# EAGLE board UniRF-Rev02 (EAGLE 6.6.0)
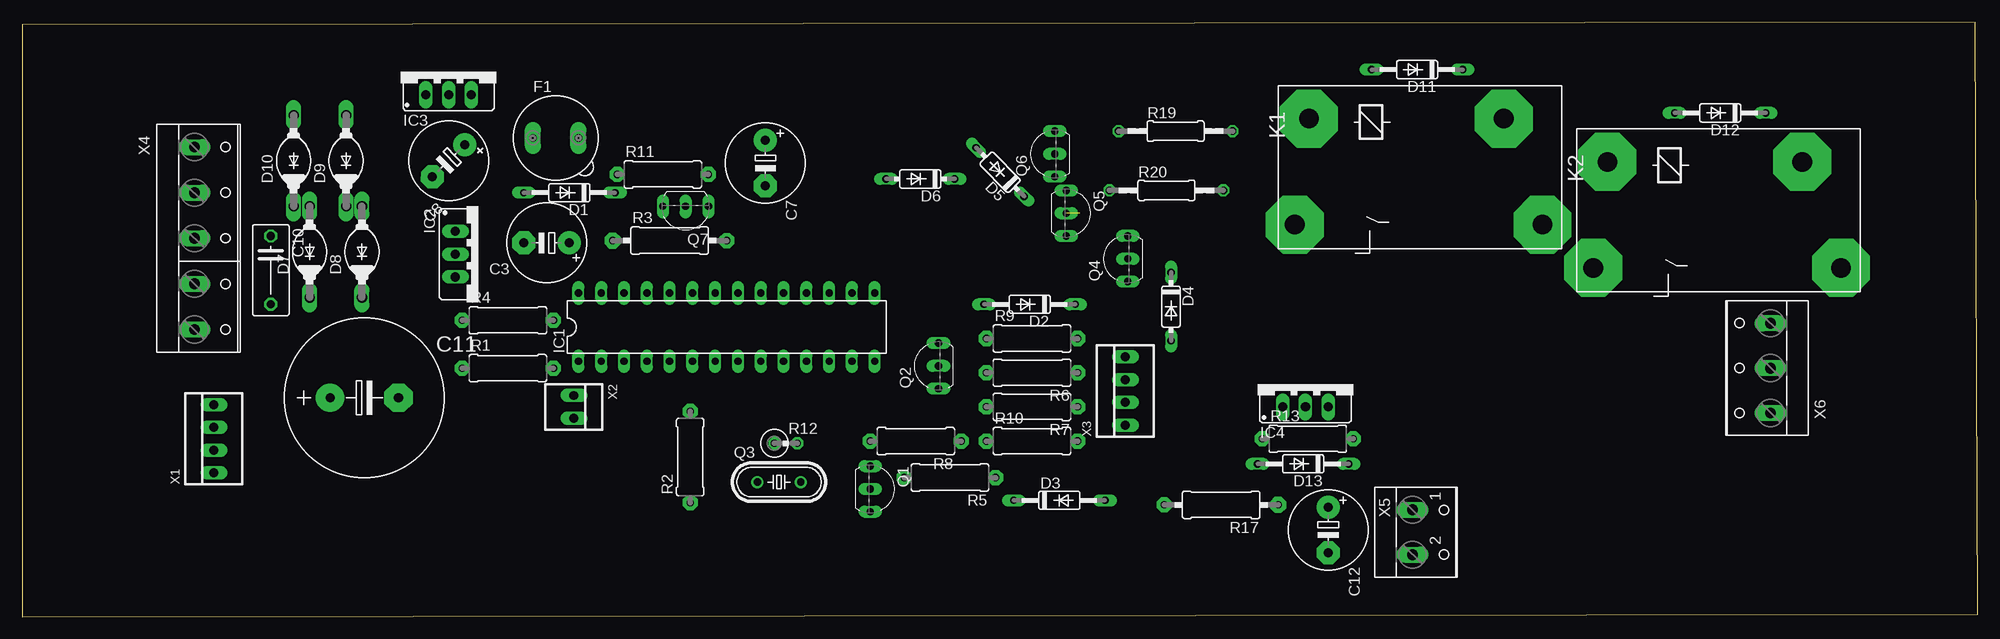
[diagram p0: board, top side]
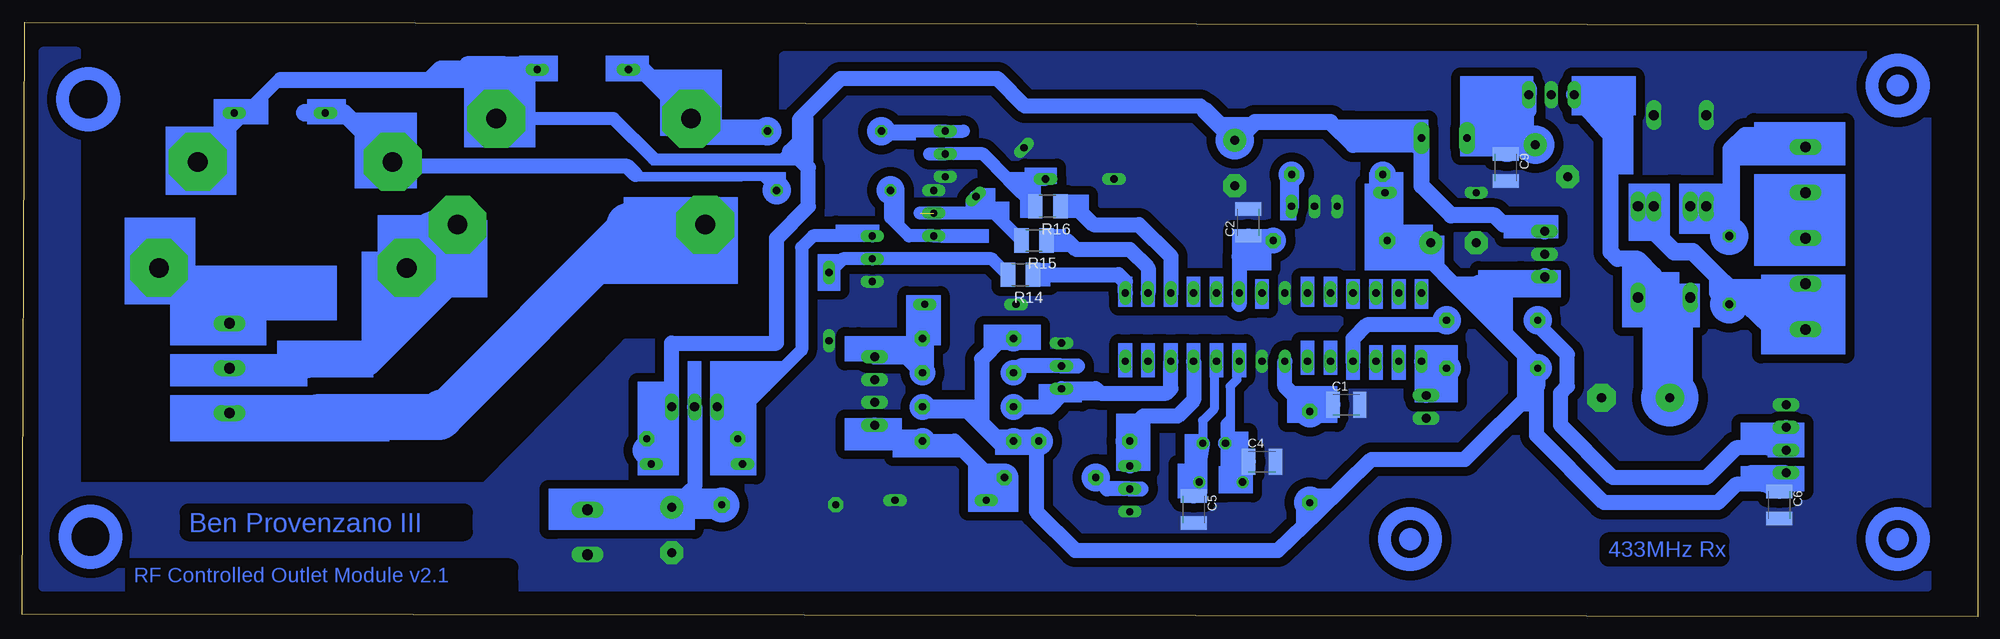
[diagram p1: board, bottom side, seen from below]

Size 217.91 x 66.22 mm. Coordinates in mm from the lower left corner, seen from the top.
Outline: 0,0 217.91,0.25 217.66,66.22 0,65.96 0,0
Copper layers (1*16): Top 0.035mm / dielectric 1.5mm / Bottom 0.035mm
Design rules "default": minimum track width 10mil, minimum drill 24mil, track to track 8mil, track to pad 8mil, pad to pad 8mil, via to via 8mil, smd to smd 8mil, copper to edge 40mil, drill to drill 8mil, minimum pad ring 10mil, minimum via ring 8mil, stop-mask expansion 4mil, vias tented up to drill 0mil, thermal gap 10mil

## Footprints (pad centres in the part's own frame; a part is rotated, then mirrored left to right if it is on the bottom)
C1210K = smd 1.5 x 2.9: 1 -1.5,0; 2 1.5,0
E5-8,5 = drill 1.016 pad 2.54: + -2.54,0 | drill 1.016 pad 2.54 octagon: - 2.54,0
C075-042X103 = drill 0.914 octagon: 1 -3.81,0; 2 3.81,0
E7,5-18 = drill 1.016 pad 3.15: + -3.81,0 | drill 1.016 pad 3.15 octagon: - 3.81,0
DO35-10 = drill 0.813 long: A 5.08,0; C -5.08,0
DO35-7 = drill 0.813 long: A 3.81,0; C -3.81,0
DO204-10 = drill 1.118 long: A 5.08,0; C -5.08,0
19560 = drill 0.813 pad 1.778 long: 1 -2.54,0; 2 2.54,0
DIL28-3 = drill 0.813 long: 1 -16.51,-3.81; 2 -13.97,-3.81; 3 -11.43,-3.81; 4 -8.89,-3.81; 5 -6.35,-3.81; 6 -3.81,-3.81; 7 -1.27,-3.81; 8 1.27,-3.81; 9 3.81,-3.81; 10 6.35,-3.81; 11 8.89,-3.81; 12 11.43,-3.81; 13 13.97,-3.81; 14 16.51,-3.81; 15 16.51,3.81; 16 13.97,3.81; 17 11.43,3.81; 18 8.89,3.81; 19 6.35,3.81; 20 3.81,3.81; 21 1.27,3.81; 22 -1.27,3.81; 23 -3.81,3.81; 24 -6.35,3.81; 25 -8.89,3.81; 26 -11.43,3.81; 27 -13.97,3.81; 28 -16.51,3.81
78XXS = drill 1.016 long: GND 0,-2.54; IN -2.54,-2.54; OUT 2.54,-2.54
G2RA = drill 2.2 pad 6.452 octagon: 1 -0.762,-5.461; 2 -5.08,6.35; P 22.53,6.35; S 20.955,-5.461
TO92-EBC = drill 0.813 long: B 0,-1.27; C -2.54,-1.27; E 2.54,-1.27
HC49/S = drill 0.813: 1 -2.413,0; 2 2.413,0
0309/10 = drill 0.8 pad 1.676 octagon: 1 -5.08,0; 2 5.08,0
0309/12 = drill 0.8 pad 1.778 octagon: 1 -6.35,0 | drill 0.8 pad 1.676 octagon: 2 6.35,0
0309V = drill 0.813 octagon: 1 -1.27,0; 2 1.27,0
R1210 = smd 1.6 x 2.7: 1 -1.4,0; 2 1.4,0
0207/12 = drill 0.813 octagon: 1 -6.35,0; 2 6.35,0
22-23-2041 = drill 1 long: 1 -3.81,0; 2 -1.27,0; 3 1.27,0; 4 3.81,0
22-23-2021 = drill 1 long: 1 -1.27,0; 2 1.27,0
W237-5P = drill 1.194 long: 1 -10.16,-0.635; 2 -5.08,-0.635; 3 0,-0.635; 4 5.08,-0.635; 5 10.16,-0.635
W237-102 = drill 1.194 long: 1 -2.5,-1.27; 2 2.5,-1.27
W237-103 = drill 1.194 long: 1 -5,-1.29; 2 0,-1.29; 3 5,-1.29

## Placement (x,y rotation side)
C1  .1  [C1210K]  70.36,23.62 0 bottom
C2  .1  [C1210K]  81.28,43.94 90 bottom
C3  47uF  [E5-8,5]  58.42,41.66 180 top
C4  22pF  [C1210K]  79.76,17.27 0 bottom
C5  22pF  [C1210K]  87.38,11.94 270 bottom
C6  .1  [C1210K]  22.1,12.45 270 bottom
C7  47uF  [E5-8,5]  82.8,50.55 270 top
C8  47uF  [E5-8,5]  47.5,50.8 224.6 top
C9  .1  [C1210K]  52.58,50.04 270 bottom
C10  .1  [C075-042X103]  27.69,38.61 270 top
C11  2200uF  [E7,5-18]  38.1,24.38 0 top
C12  47uF  [E5-8,5]  145.54,9.65 270 top
D1  TVS_5V  [DO35-10]  60.96,47.24 180 top
D2  TVS_5V  [DO35-10]  112.27,34.8 180 top
D3  TVS_5V  [DO35-10]  115.57,12.95 0 top
D4  9V1  [DO35-7]  128.02,34.54 270 top
D5  9V1  [DO35-7]  108.97,49.53 134.6 top
D6  9V1  [DO35-7]  100.08,48.77 180 top
D7  4007  [DO204-10]  32,40.64 90 top
D8  4007  [DO204-10]  37.85,40.64 90 top
D9  4007  [DO204-10]  36.07,50.8 90 top
D10  4007  [DO204-10]  30.23,50.8 90 top
D11  4007  [DO35-10]  155.45,60.96 180 top
D12  4007  [DO35-10]  189.23,56.13 180 top
D13  9V1  [DO35-10]  142.75,17.02 180 top
F1  1A  [19560]  59.44,53.34 0 top
IC1  ATmega328p  [DIL28-3]  78.49,32.26 0 top
IC2  7805  [78XXS]  50.8,40.39 270 top
IC3  7812  [78XXS]  47.5,60.71 0 top
IC4  PMOS  [78XXS]  143,25.91 0 top
K1  ALF1P12  [G2RA]  164.34,50.04 180 top
K2  ALF1P12  [G2RA]  197.61,45.21 180 top
Q1  BC546  [TO92-EBC]  95.76,14.22 270 top
Q2  BC546  [TO92-EBC]  100.84,27.94 90 top
Q3  16MHz  [HC49/S]  84.33,14.99 0 top
Q4  2106  [TO92-EBC]  121.92,39.88 90 top
Q5  2106  [TO92-EBC]  117.6,44.96 270 top
Q6  2106  [TO92-EBC]  113.79,51.56 90 top
Q7  3LED  [TO92-EBC]  73.91,44.45 180 top
R1  10K  [0309/10]  54.1,27.69 0 top
R2  BEAD  [0309/10]  74.42,17.78 90 top
R3  BEAD  [0309/12]  72.14,41.91 0 top
R4  100  [0309/10]  54.1,33.02 0 top
R5  330  [0309/10]  103.38,15.49 180 top
R6  330  [0309/10]  112.52,27.18 180 top
R7  11K  [0309/10]  112.52,23.37 180 top
R8  11K  [0309/10]  99.57,19.56 180 top
R9  4K7  [0309/10]  112.52,30.99 0 top
R10  4K7  [0309/10]  112.52,19.56 0 top
R11  2K7  [0309/10]  71.37,49.28 0 top
R12  1M  [0309V]  85.09,19.3 0 top
R13  4K7  [0309/10]  143.26,19.81 0 top
R14  1K  [R1210]  106.68,38.1 180 bottom
R15  1K  [R1210]  105.16,41.91 180 bottom
R16  1K  [R1210]  103.63,45.72 180 bottom
R17  1K  [0309/12]  133.6,12.45 180 top
R19  0  [0207/12]  128.52,54.1 0 top
R20  0  [0207/12]  127.51,47.5 0 top
X1  RX_MOD  [22-23-2041]  21.34,19.81 90 top
X2  RESET  [22-23-2021]  61.47,23.37 270 top
X3  SWITCH  [22-23-2041]  122.94,25.15 90 top
X4  [W237-5P]  19.81,42.16 270 top
X5  [W237-102]  156.21,9.4 270 top
X6  [W237-103]  193.55,27.69 90 top

## Library data of the parts
C1-C12 R1-R17 R19 R20 = resistor
D1-D13 = diode
F1 = fuse; MPN: 56000001009; OC_FARNELL: 1185363; OC_NEWARK: 15P8392
IC1 = ic-package
IC2-IC4 = v-reg
K1 K2 = relay; OC_FARNELL: unknown; OC_NEWARK: unknown
Q1 Q2 Q4-Q7 = transistor-npn
Q3 = crystal; OC_FARNELL: 1667008; OC_NEWARK: unknown
X1 X3 = con-molex; MF: MOLEX; MPN: 22-23-2041; OC_FARNELL: 1462920; OC_NEWARK: 38C0355
X2 = con-molex; MF: MOLEX; MPN: 22-23-2021; OC_FARNELL: 1462926; OC_NEWARK: 25C3832
X4 = con-wago-508; OC_FARNELL: unknown; OC_NEWARK: unknown
X5 = con-wago-500; MPN: 237-102; OC_FARNELL: unknown; OC_NEWARK: 70K9898
X6 = con-wago-500; MPN: 237-103; OC_FARNELL: unknown; OC_NEWARK: 18M7116

## Nets
GND: C1.2 C2.2 C3.- C4.2 C5.2 C6.2 C7.- C8.- C9.2 C11.- C12.- D1.A D2.A D3.A D4.A D5.A D6.A D9.A D10.A IC1.8 IC1.22 IC2.GND IC3.GND Q1.E Q2.E Q4.C Q5.C Q6.C Q7.B Q7.E R17.2 X1.4 X2.2 X3.2 X3.3 X5.2
N$1: D4.C Q4.B R14.2
N$2: IC1.1 R1.2 X2.1
N$3: IC1.4 R4.2
N$4: C2.1 IC1.20 R3.2
N$5: R4.1 X1.2 X1.3
N$7: IC1.11 Q1.C R8.2
N$8: Q1.B R5.2
N$9: C3.+ C6.1 D1.C IC2.OUT R1.1 R2.1 R3.1 R7.1 R8.1 R9.1 R10.1 R11.1 X1.1
N$10: Q2.B R6.2
N$11: IC1.12 Q2.C R7.2
N$13: C4.1 IC1.9 Q3.1 R12.1
N$14: C5.1 IC1.10 Q3.2 R12.2
N$15: D3.C R5.1 R10.2 X3.1
N$16: D2.C R6.1 R9.2 X3.4
N$17: D6.C Q6.B R16.2
N$18: IC1.15 R14.1
N$19: IC1.16 R15.1
N$20: IC1.17 R16.1
N$21: D5.C Q5.B R15.2
N$22: Q7.C R11.2
N$24: C7.+ D11.C D12.C D13.C F1.2 IC2.IN IC4.OUT K1.1 K2.1 R13.2
N$25: C8.+ C9.1 F1.1 IC3.OUT
N$26: C10.2 D8.A D9.C X4.4 X4.5
N$27: D13.A IC4.IN Q4.E R13.1
N$28: Q5.E R20.1
N$29: Q6.E R19.1
N$30: C10.1 D7.A D10.C X4.1
N$31: C11.+ D7.C D8.C IC3.IN
N$32: C12.+ IC4.GND R17.1 X5.1
N$33: D11.A K1.S R19.2
N$35: C1.1 IC1.7 R2.2
N$36: K2.2 X6.3
N$37: X4.2 X4.3
N$38: D12.A K2.S R20.2
N$39: K1.P X6.1
N$43: K1.2 K2.P X6.2

## Tracks (layer width: path | path; a pad name or v marks a point on that pad's centre or on a via)
GND
  pour Bottom (isolate 1.016, no thermals): 5.59,62.48 133.1,62.48 133.1,30.48 150.62,30.48 166.37,14.48 211.84,14.48 211.84,62.99 215.65,62.99 215.65,3.3 5.59,3.3
N$1
  Bottom 1.422: R14.2 109.86,39.88 Q4.B 126.49,39.88 D4.C
N$2
  Bottom 1.676: R1.2 59.94,28.45 61.21,28.45 | 61.21,28.45 IC1.1 | X2.1 61.21,24.89 61.21,28.45
N$3
  Bottom 1.676: IC1.4 69.6,30.99 68.07,32.51 59.69,32.51 R4.2
N$4
  Bottom 1.676: 82.3,34.8 IC1.20 82.3,40.13 81.28,41.15 | R3.2 79.25,41.15 81.28,41.15 | 81.28,41.15 C2.1
N$5
  Bottom 1.676: X1.2 X1.3 22.61,19.81 22.61,19.56 23.37,18.8 26.92,18.8 30.23,15.49 40.64,15.49 46.48,21.34 46.48,24.89 45.72,25.65 45.72,29.21 49.02,32.51 R4.1
N$6
  Bottom 1.676: 49.53,28.19 49.53,28.45 52.32,31.24
N$7
  Bottom 1.676: IC1.11 87.38,24.13 89.15,22.35 92.96,22.35 94.49,20.83 R8.2 Q1.C
N$8
  Bottom 1.676: 93.22,14.22 Q1.B 97.03,14.22 R5.2
N$9
  Bottom 1.676: R1.1 57.15,35.81 61.98,40.64 C3.+ R3.1 65.79,46.23 65.91,46.71 | R1.1 49.02,25.65 49.15,25.53 | 49.15,25.53 57.15,17.53 67.56,17.53 73.62,11.63 | 65.91,46.71 D1.C 66.29,46.23 | 48.51,27.43 48.77,27.69 R1.1 | R11.1 65.91,49.28 65.91,46.71 | X1.1 25.38,16 C6.1 23.9,14.73 26.92,14.73 28.96,12.7 41.66,12.7 49.15,20.19 49.15,25.53 | R7.1 113.03,23.37 | 113.03,23.37 108.71,19.05 107.19,19.05 107.44,19.3 R10.1 107.19,19.3 105.92,19.3 105.66,19.56 R8.1 | 113.03,23.37 112.01,23.37 111,22.35 | 111,22.35 111,21.59 108.71,19.3 104.65,19.3 104.9,19.05 104.9,11.68 100.58,7.37 77.98,7.37 73.62,11.63 | R2.1 73.62,11.89 73.62,11.63 | R9.1 107.7,30.73 108.97,30.73 111,28.7 111,22.35
  Bottom 1.778: 55.63,37.08 56.9,35.81 57.15,35.81
  Bottom 1.93: IC2.OUT 49.02,37.08 55.63,37.08
N$10
  Bottom 1.676: 100.33,27.94 Q2.B 106.68,27.94 R6.2
N$11
  Bottom 1.676: R7.2 103.38,23.37 102.11,24.64 Q2.C 98.3,25.4 97.79,24.89 90.42,24.89 89.92,25.4 IC1.12
N$13
  Bottom 1.016: IC1.9 82.55,28.19 82.55,26.42 83.31,25.65 83.31,22.1 83.82,21.59 R12.1 83.82,19.05
  Bottom 1.676: R12.1 83.82,19.33 C4.1 83.03,15.09 Q3.1
N$14
  Bottom 1.016: IC1.10 85.09,28.45 85.09,23.11 86.36,21.84 R12.2
  Bottom 1.676: R12.2 C5.1 87.91,15.14 Q3.2
N$15
  Bottom 1.676: R5.1 109.79,14.76 | 109.79,14.76 D3.C | X3.1 121.16,19.56 R10.2 114.05,19.56 109.98,15.49 109.98,14.95 109.79,14.76
N$16
  Bottom 1.676: X3.4 119.38,28.96 R6.1 R9.2 117.35,31.24 D2.C
N$17
  Bottom 1.422: R16.2 108.02,48.7 | 108.02,48.7 110.87,51.56 Q6.B 116.84,51.56 | D6.C 103.95,48.7 108.02,48.7
N$18
  Bottom 1.676: R14.1 95.76,38.1 95,37.34 IC1.15
N$19
  Bottom 1.676: IC1.16 92.46,38.86 94.49,40.89 100.45,40.89 101.47,41.91 R15.1
N$20
  Bottom 1.676: IC1.17 89.92,40.13 93.47,43.69 98.55,43.69 100.45,45.59 R16.1
N$21  (1 unrouted)
  Bottom 1.422: R15.2 109.6,44.96 111.76,44.96 | D5.C 111.76,46.7 111.76,44.96 | 111.76,44.96 117.86,44.96
N$22
  Bottom 1.676: Q7.C R11.2
N$24
  Bottom 1.016: 133.1,51.05 147.57,51.05
  Bottom 1.27: 132.33,51.82 133.1,51.05
  Bottom 1.422: 147.57,51.05 152.02,55.5 K1.1 | D11.C 160.78,60.71 165.1,60.71 164.08,61.72 | 164.08,61.72 160.53,61.72 | 164.08,61.72 168.4,61.72 167.64,60.96 166.37,60.96 166.62,61.21 171.45,61.21 172.72,59.94 189.23,59.94 193.04,56.13 | 193.04,56.13 198.37,50.8 K2.1 | 193.04,56.13 D12.C
  Bottom 1.676: 86.11,56.39 86.61,56.9 106.17,56.9 109.22,59.94 126.75,59.94 131.32,55.37 131.32,52.83 | 132.21,51.94 130.3,50.04 130.3,45.72 133.86,42.16 133.86,30.48 145.54,30.48 IC4.OUT 145.54,21.34 147.32,19.56 | R13.2 147.32,19.56 | D13.C 147.07,17.53 147.32,19.56
  Bottom 1.778: IC2.IN 49.02,43.69 52.83,43.69 53.85,44.7 58.67,44.7 61.98,48.01 F1.2 62.74,52.58 69.6,52.58 72.14,55.12 80.52,55.12 82.55,53.09 C7.+ | 131.32,52.83 132.21,51.94 132.33,51.82
  Bottom 1.93: C7.+ 86.11,56.39 | 165.1,60.71 K1.1
N$25
  Bottom 1.778: 50.29,53.57 C8.+ 50.06,53.34 F1.1 | 50.29,53.57 50.29,59.18 50.04,58.93 IC3.OUT 50.04,56.39 | 50.29,53.57 52.32,51.54 C9.1
N$26
  Bottom 1.93: C10.2 28.96,36.07 28.96,37.85 | 28.96,37.85 31.75,40.64 33.78,40.64 36.83,43.69 36.83,45.72 D9.C D8.A | X4.4 X4.5 20.96,30.23 28.96,37.85
N$27
  Bottom 1.422: Q4.E 129.79,42.42 131.06,41.15 131.06,29.72 138.18,22.61 | 138.18,22.61 R13.1 138.18,19.05 | IC4.IN 139.7,22.61 138.18,22.61
  Bottom 1.676: D13.A 138.43,17.78 138.18,19.05
N$28
  Bottom 1.422: 114.55,42.42 Q5.E 119.13,42.42 121.16,44.45 R20.1
N$29
  Bottom 1.422: 113.03,54.1 Q6.E R19.1
N$30
  Bottom 1.93: D7.A D10.C 30.23,44.96 C10.1 27.69,43.18 27.43,43.43 27.43,52.07 25.91,53.59 19.69,53.59 X4.1
N$31
  Bottom 1.778: 36.07,35.56 36.07,38.1 37.85,39.88 40.13,39.88 40.89,40.64 40.89,53.59 IC3.IN
  Bottom 1.93: C11.+ 35.05,27.69 35.05,35.81 | 35.05,35.81 34.8,35.56 D7.C | 35.05,35.81 35.31,35.56 36.07,35.56 D8.C
N$32
  Bottom 1.676: IC4.GND 143,14.48 143.76,13.72 | 143.76,13.72 145.41,12.06 | 145.41,12.06 145.58,11.9 X5.1 | C12.+ 145.41,12.06 | R17.1 140.21,12.7 142.49,12.7 143.51,13.72 143.76,13.72
N$33
  Bottom 1.016: R19.2 137.67,53.34 141.73,53.34 143.38,54.99 K1.S
  Bottom 1.676: 141.35,57.02 141.22,57.15
  Bottom 1.93: 151.89,60.96 D11.A 148.84,60.96 K1.S 141.35,57.02
N$35
  Bottom 1.676: C1.1 72.62,22.86 R2.2 77.22,25.65 IC1.7
N$36
  Bottom 2.54: K2.2 201.01,38.86 X6.3
N$37
  Bottom 1.93: X4.2 X4.3
N$38
  Bottom 1.016: R20.2 135.38,49.02 149.61,49.02 149.61,49.28
  Bottom 1.676: 149.61,49.28 150.5,50.17 174.88,50.17
  Bottom 1.93: K2.S 177.04,51.05 | 177.04,51.05 182.12,56.13 D12.A 186.44,56.13 | 174.75,50.04 174.88,50.17 175.51,50.8 177.29,50.8 177.04,51.05
N$39
  Bottom 2.54: 185.17,22.86 194.66,22.86 X6.1
  Bottom 3.81: K1.P 150.37,43.69 | 171.2,22.86 185.17,22.86
  Bottom 4.826: 150.37,43.69 150.37,43.18 171.2,22.35 | 176.02,22.35 184.4,22.35 184.66,22.1 171.45,22.1 171.2,22.35 | 171.2,22.35 171.2,22.86
N$43
  Bottom 2.54: X6.2 187.2,27.69 182.12,28.7
  Bottom 3.81: K2.P arc90 170.26,43.69 | 170.26,43.69 K1.2 | 182.12,28.7 179.58,28.7 169.67,38.61 169.67,43.1 170.26,43.69
(copper drawn outside any net)
  shapes: Bottom area x245, Bottom circle x44

## Text on the board
Bottom: Ben Provenzano III | 433MHz Rx | RF Controlled Outlet Module v2.1